# Altium PCB Hierarchy Test PCB.PcbDoc
Units mm, origin at the board's own origin, x right, y up, seen from the top; angles counter-clockwise.
Board outline 30 x 60 mm, 2 copper layers (Top Layer, Bottom Layer); 15 components, 9 nets, 32 pads, 6 vias.
Unrouted connection lines stored in the file: 2.
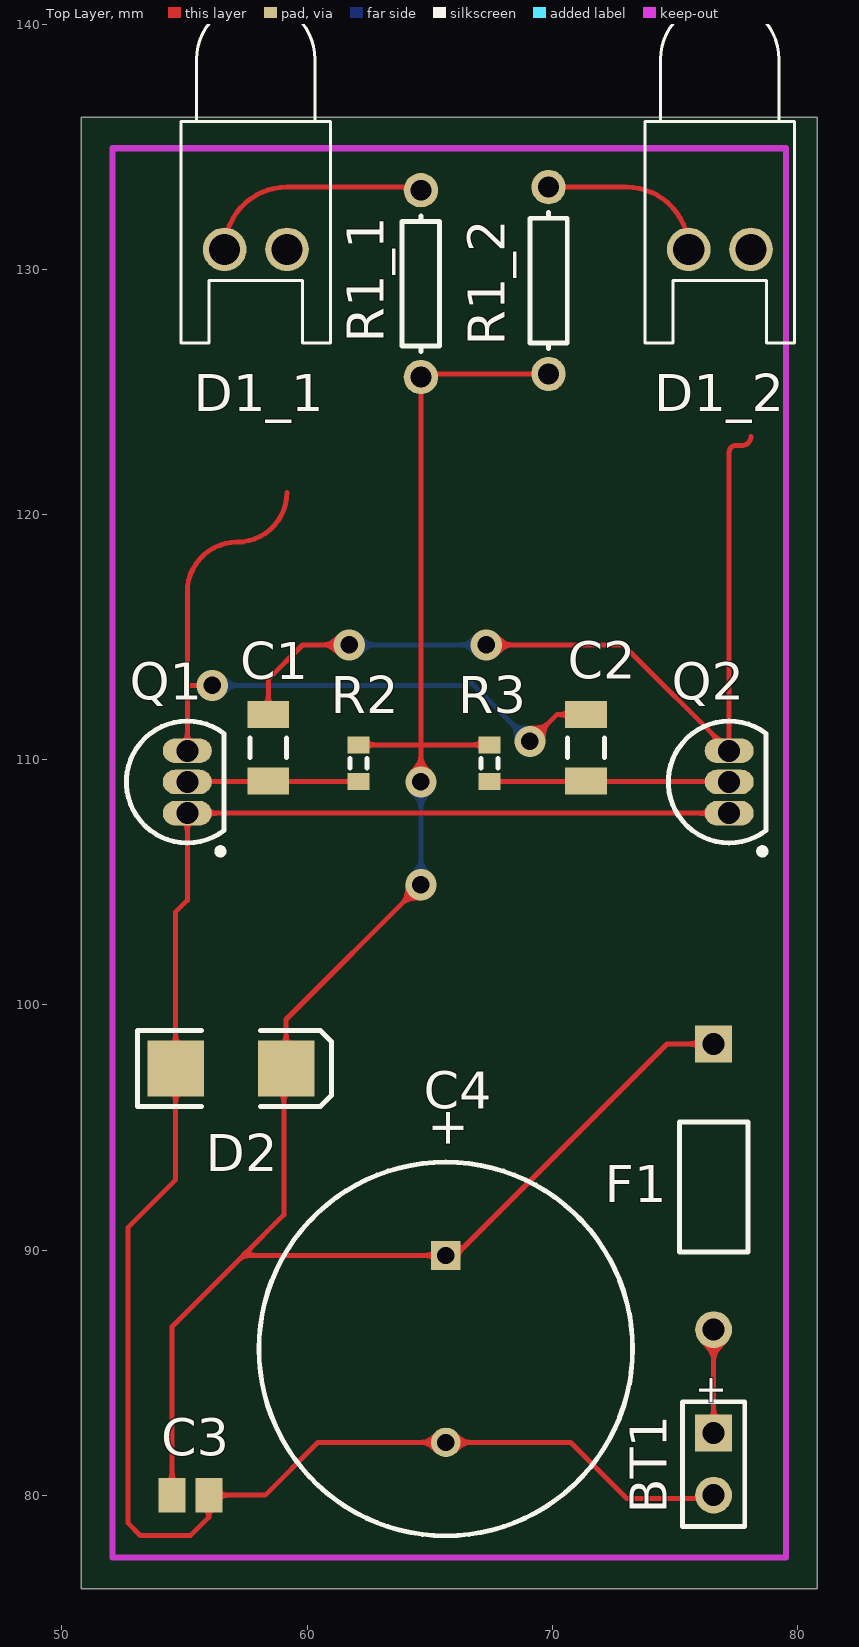
[diagram p0: Top Layer view]
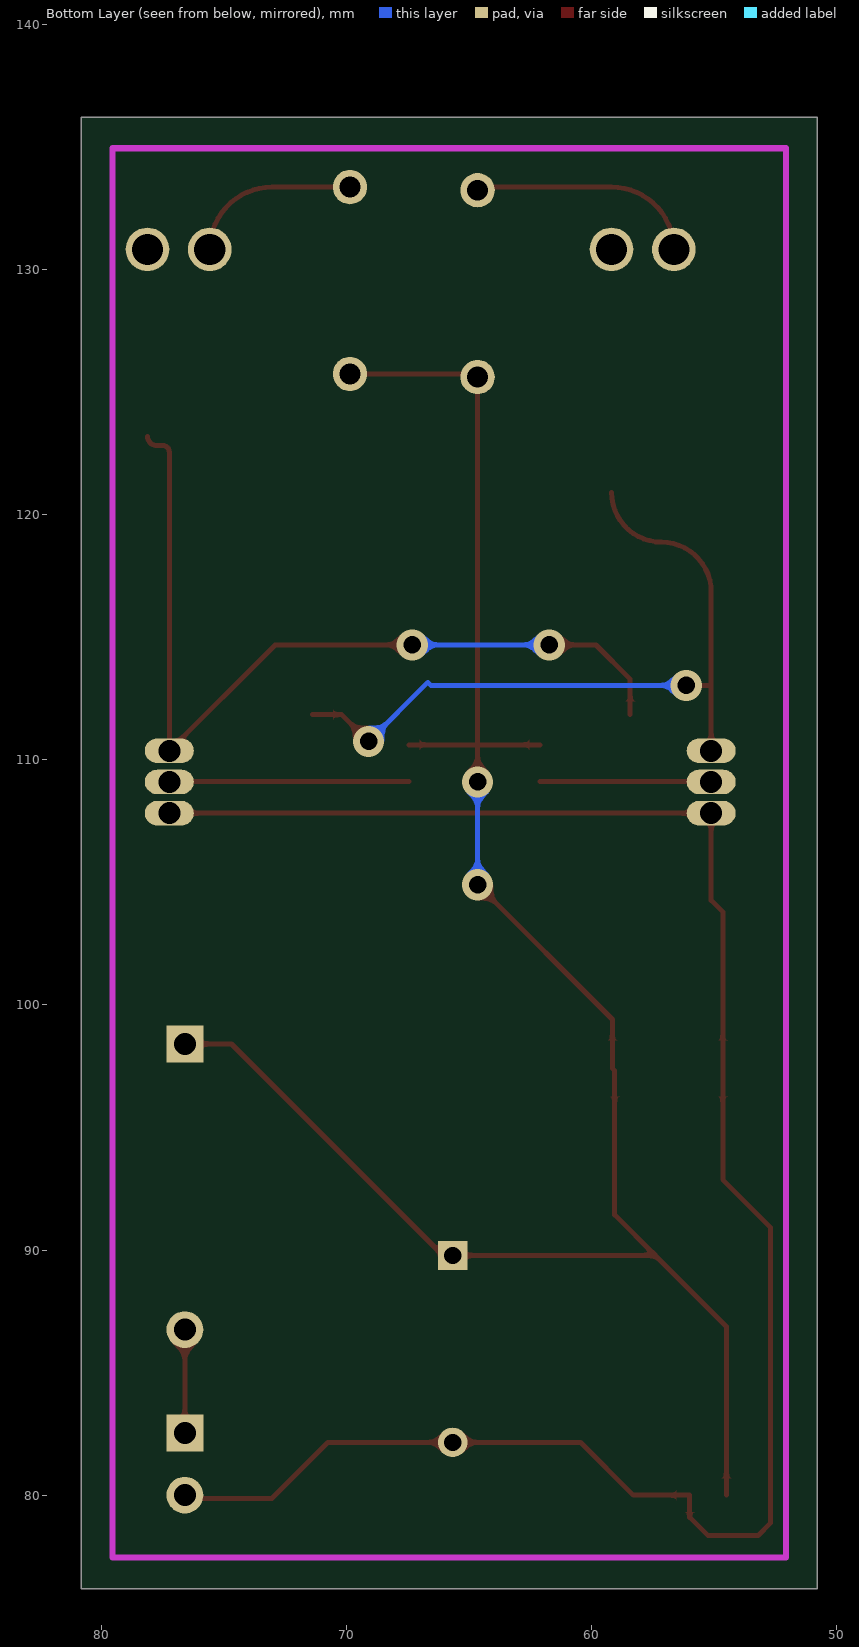
[diagram p1: Bottom Layer view, seen from below]

## Layer stack, top to bottom
Top Solder: solder mask 0.0102, Solder Resist, Dk 3.5
Top Layer: signal copper 0.0356
Dielectric 1: dielectric 0.32, FR-4, Dk 4.8
Bottom Layer: signal copper 0.0356
Bottom Solder: solder mask 0.0102, Solder Resist, Dk 3.5

## Board outline
50.8,76.2 80.8,76.2 80.8,136.2 50.8,136.2

## Design rules (kind name [scope] priority, off if disabled: settings)
Clearance [All] p1: gap=0.203
PolygonConnect [All] p1: connectstyle=Relief reliefconductorwidth=0.254 reliefentries=4 polygonreliefangle="90 Angle" airgapwidth=0.254
RoomDefinition Ind2 [InComponentClass('Ind2')] p1: confinementstyle=ConfineIn formatcopy=TRUE lockcomponents=FALSE outline 66.167,118.618 80.264,118.618 80.264,141.478 66.167,141.478
RoomDefinition Ind1 [InComponentClass('Ind1')] p2: confinementstyle=ConfineIn formatcopy=TRUE lockcomponents=FALSE outline 52.451,118.618 65.786,118.618 65.786,141.478 52.451,141.478
RoomDefinition PSU [InComponentClass('PSU')] p3: confinementstyle=ConfineIn formatcopy=TRUE lockcomponents=FALSE outline 51.435,78.244 80.137,78.244 80.137,99.949 51.435,99.949
RoomDefinition MV [InComponentClass('MV')] p4: confinementstyle=ConfineIn formatcopy=TRUE lockcomponents=FALSE outline 51.435,102.489 80.899,102.489 80.899,115.443 51.435,115.443
RoutingVias [All] p1: holewidth=0.635 width=1.016 viastyle="Through Hole" minholewidth=0.711 minwidth=1.27 maxholewidth=0.711 maxwidth=1.27
SolderMaskExpansion [All] p1: expansion=0.102
Width [All] p1: maxlimit=0.203 minlimit=0.203 preferedwidth=0.203
30 further rules are at their usual default settings.

## Classes and differential pairs
component class Ind1: D1_1 R1_1
component class Ind2: D1_2 R1_2
component class MV: C1 C2 Q1 Q2 R2 R3
component class PSU: BT1 C3 C4 D2 F1
net class COL[1..2]: COL1 COL2
channel class "LED Indicators": LEDs1 LEDs2

## Components (designator, comment, footprint, x,y, rotation, side; value= is the part's Value field where it differs from the comment)
BT1 "Battery" BAT-2 76.581,81.28 r270 top
C1 "Cap Semi" C1206 58.42,110.49 r90 top
C2 "Cap Semi" C1206 71.374,110.49 r270 top
C3 "Cap Pol3" C0805 55.245,80.01 r0 top
C4 "Cap Pol1" RB7.6-15 65.659,85.974 r90 top
D1_1 "LED0" LED-0 57.912,130.81 r180 top (schematic designator D1)
D1_2 "LED0" LED-0 76.835,130.81 r180 top (schematic designator D1)
D2 "D Schottky" SMB 56.896,97.409 r0 top
F1 "Fuse 1" PIN-W2/E2.8 76.581,92.583 r270 top
Q1 "2N3904" TO-92A 55.118,109.093 r0 top
Q2 "2N3904" TO-92A 77.216,109.093 r0 top
R1_1 "Res1" AXIAL-0.3 64.643,129.413 r90 top (schematic designator R1)
R1_2 "Res1" AXIAL-0.3 69.85,129.54 r90 top (schematic designator R1)
R2 "Res3" J1-0603 62.103,109.855 r90 top
R3 "Res3" J1-0603 67.437,109.855 r90 top

## Footprints (in the part's own frame and the unit in brackets; to place one, negate y for a bottom-side part, rotate by r counter-clockwise, add the part's x,y. Pads: shape width x height; smd on the part's side, far side on the other; paste and mask are expansions set on the pad)
AXIAL-0.3 [mm] "Axial Device, Thru-Hole; 2 Leads; 0.3 in Pin Spacing"
  round 1.4 hole 0.85: 1(-3.81,0) 2(3.81,0)
  silkscreen extent -2.77,-0.76 2.77,0.76
BAT-2 [mm] "Battery; 2 Leads"
  rect 1.5x1.5 hole 0.9: 1(-1.27,0)
  round 1.5 hole 0.9: 2(1.27,0)
  silkscreen extent -2.54,-1.27 2.54,1.27
C0805 [mm] "Chip Capacitor, Body 2.0x1.3mm, IPC High Density"
  rect 1.1x1.4 smd: 1(-0.75,0) 2(0.75,0)
  body extent -1.1,-0.72 1.1,0.72, height 1.4
C1206 [mm] "Chip Capacitor, Body 3.2x1.6mm, IPC High Density"
  rect 1.1x1.7 smd: 1(-1.35,0) 2(1.35,0)
  silkscreen extent -0.4,-0.75 0.4,0.75, body extent -1.7,-0.9 1.7,0.9, height 1.3
J1-0603 [mm] "Chip Resistor, Body 1.6x0.8mm, IPC High Density"
  rect 0.7x0.9 smd: 1(-0.75,0) 2(0.75,0)
  silkscreen extent -0.2,-0.35 0.2,0.35, body extent -0.85,-0.48 0.85,0.48, height 0.9
LED-0 [mil] "LED; 2 Leads"
  round 70 hole 50: 1(50,0) 2(-50,0)
  silkscreen extent -120,-400 120,150
PIN-W2/E2.8 [mm] "Thru-Hole; 2 Leads"
  rect 1.5x1.5 hole 0.9: 1(-5.825,0)
  round 1.5 hole 0.9: 2(5.825,0)
  silkscreen extent -2.65,-1.4 2.65,1.4
RB7.6-15 [mm] "Polarized Capacitor (Radial); 2 Leads"
  rect 1.2x1.2 hole 0.7: 1(3.81,0)
  round 1.2 hole 0.7: 2(-3.81,0)
  silkscreen extent -7.62,-7.62 7.62,7.62
SMB [mm] "DO-214-AA/SMB; 2 C-Bend Leads; Body 5.3 x 3.6 mm, inc. leads (LxW)"
  rect 2.3x2.3 smd: 1(-2.25,0) 2(2.25,0)
  silkscreen extent -3.8,-1.55 4.1,1.55
TO-92A [mm] "TO, Flat Index; 3 In-Line, Axial Leads; Body Dia. 4.5mm; Leads 0.51 x 0.48 mm (max)"
  oval 2x1 hole 0.9: 1(0,-1.27) 2(0,0) 3(0,1.27)
  silkscreen extent -2.48,-2.95 1.5,2.48, body extent -2.5,-2.5 1.5,2.5, height 6.86

## Part data
BT1: "Multicell Battery"
C1 C2: "Capacitor (Semiconductor SIM Model)"
C3: "Polarized Capacitor (Surface Mount)"
C4: "Polarized Capacitor (Radial)"
D1_1 D1_2: "Typical INFRARED GaAs LED"
D2: "Schottky Diode"
F1: "Fuse"
Q1 Q2: "NPN General Purpose Amplifier"
R1_1 R1_2 R2 R3: "Resistor"

## Via types
v1: diameter 1.27, hole 0.711, Top Layer to Bottom Layer, tented both sides, 6 vias

## Nets (pads, with @x,y where several pads share a name; then routed paths per layer and width w, separated by ;. In a path a pad name is that pad's centre, name@x,y a point inside that pad or via, vN(x,y) a via of type N, cw(c..) or ccw(c..) an arc to the next point about the centre after c; other vN are vias at no path point)
+9V: C3.1 C4.1 D2.2 F1.1 R1_1.1 R1_2.1 R2.2 R3.2 | length 83.1
  Top Layer w0.203: C3.1 54.495,86.88 57.399,89.784 ; D2.2@59.055,97.318 59.055,91.44 57.399,89.784 ; D2.2 59.146,99.405 v1(64.643,104.902) ; R2.2 64.643,110.605 ; v1(64.643,109.093) 64.643,110.605 ; R3.2 64.643,110.605 ; R1_2.1 64.643,125.73 R1_1.1 64.643,110.605 ; F1.1 74.681,98.408 66.057,89.784 C4.1 57.399,89.784
  Bottom Layer w0.203: v1(64.643,104.902) v1(64.643,109.093)
COL1: C2.1 D1_1.2 Q1.3 | length 30.6
  Top Layer w0.203: Q1.3 55.118,113.03 ; v1(56.134,113.03) 55.118,113.03 ; 59.182,120.904 cw(c57.15,120.904) 57.15,118.872 ccw(c57.15,116.84) 55.118,116.84 55.118,113.03 ; v1(69.088,110.744) 70.184,111.84 C2.1
  Bottom Layer w0.203: v1(56.134,113.03) 66.548,113.03 66.675,113.157 v1(69.088,110.744)
COL2: C1.2 D1_2.2 Q2.3 | length 36.1
  Top Layer w0.203: C1.2 58.42,113.284 59.817,114.681 v1(61.722,114.681) ; v1(67.31,114.681) 72.898,114.681 Q2.3 77.216,122.555 cw(c77.47,122.555) 77.47,122.809 77.724,122.809 ccw(c77.724,123.19) 78.105,123.19
  Bottom Layer w0.203: v1(61.722,114.681) v1(67.31,114.681)
GND: BT1.2 C3.2 C4.2 D2.1 Q1.1 Q2.1 | length 79.2
  Top Layer w0.203: BT1.2@76.581,79.878 73.03,79.878 70.744,82.164 C4.2 60.447,82.164 58.293,80.01 C3.2 55.995,79.109 55.245,78.359 53.213,78.359 52.705,78.867 52.705,90.932 54.646,92.873 D2.1 54.646,103.795 55.118,104.267 Q1.1 Q2.1
NetBT1_1: BT1.1 F1.2 | length 4.2
  Top Layer w0.203: BT1.1 F1.2
NetC1_1: C1.1 Q1.2 R2.1 | length 7
  Top Layer w0.203: Q1.2@55.13,109.105 R2.1
NetC2_2: C2.2 Q2.2 R3.1 | length 9.8
  Top Layer w0.203: R3.1 Q2.2@77.204,109.105
NetD1_1_1: D1_1.1 R1_1.2 | length 9.5
  Top Layer w0.203: D1_1.1 cw(c59.182,130.81) 59.182,133.35 R1_1.2@64.643,133.35
NetD1_2_1: D1_2.1 R1_2.2 | length 7.2
  Top Layer w0.203: R1_2.2 73.025,133.35 cw(c73.025,130.81) D1_2.1

## Keep-outs
Keep-Out Layer:
  lines w0.254: 52.07,77.47 79.53,77.47 79.53,134.93 52.07,134.93 52.07,77.47

## Silkscreen, mask and mechanical layers (free items; w line width, h text height)
Drill Drawing:
  text ".LEGEND" at 84.455,73.66 h1.52
  text "Drill Drawing." at 83.82,70.993 h1.52

## Dimensions
52.07,77.47 to 79.53,77.47 on Mechanical 1
52.07,77.47 to 52.07,134.93 on Mechanical 1

## Text inside footprints (layer, text, board x,y; h text height)
BT1: Top Overlay "+" at 76.004,84.95 h1.15 r270
C4: Top Overlay "+" at 66.396,94.106 h1.5 r90